# EAGLE board V1 (EAGLE 9.1.3)
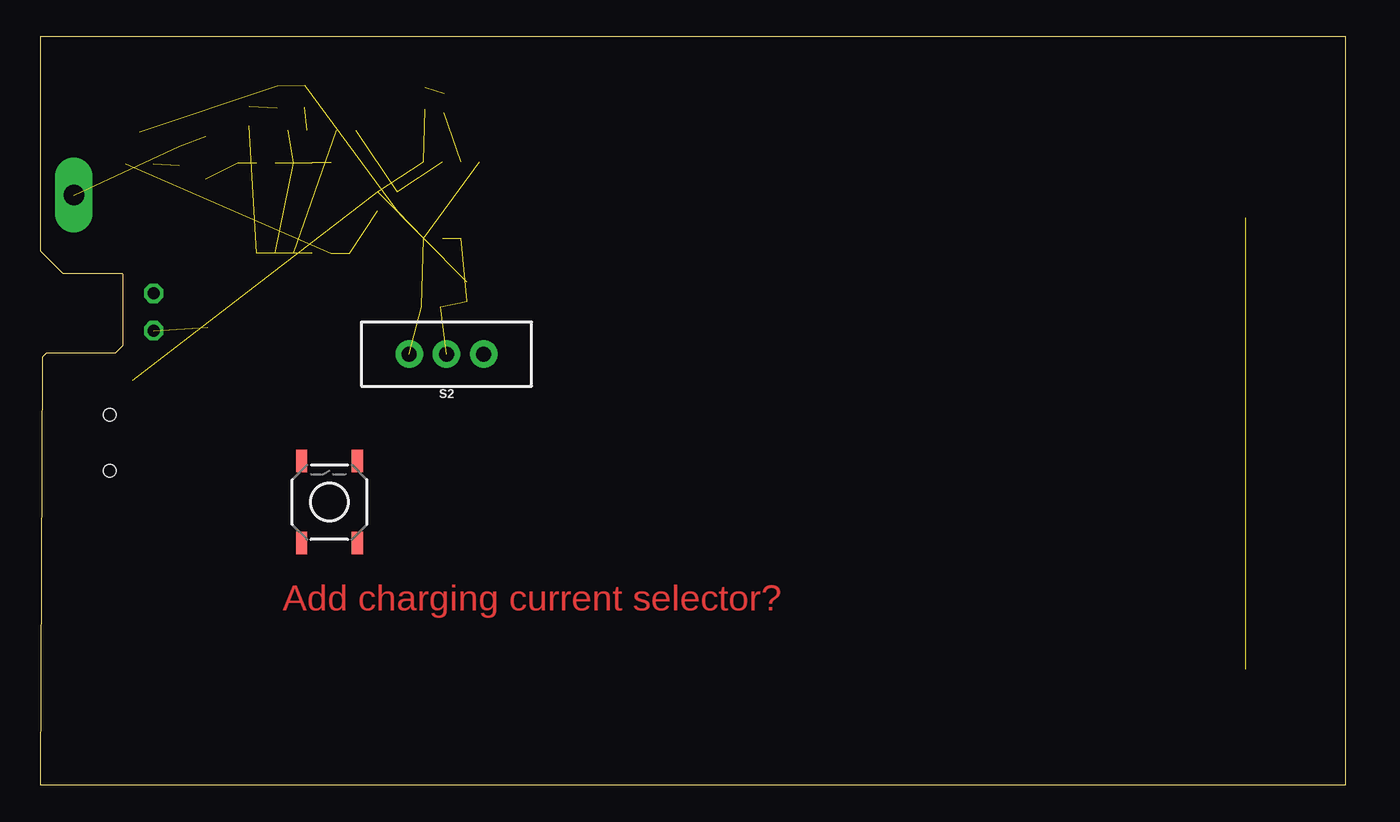
[diagram p0: board, top side]
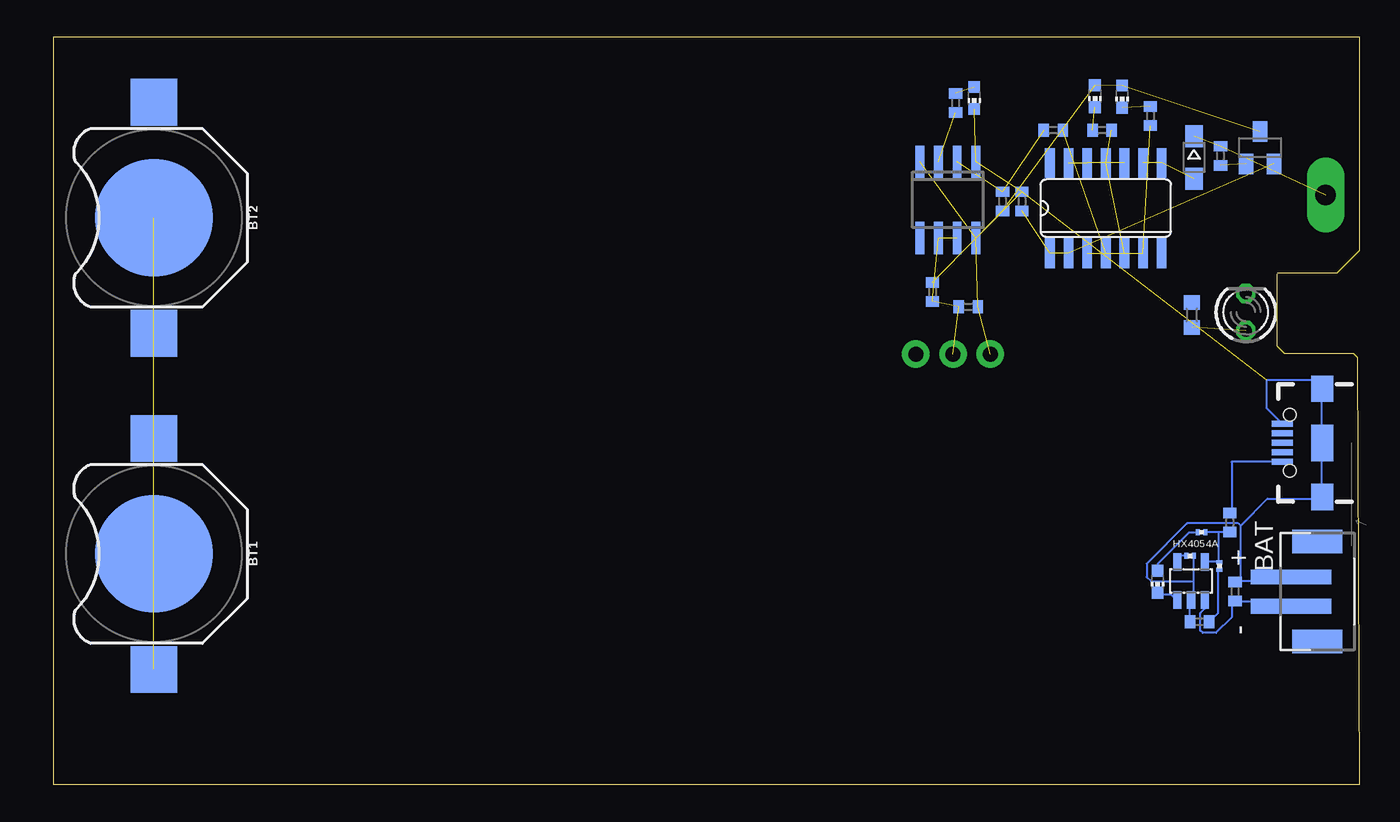
[diagram p1: board, bottom side, seen from below]

Size 89 x 51 mm. Coordinates in mm from the lower left corner, seen from the top.
Outline: 0,0 89,0 89,51 0,51 0,36.4 1.52,34.87 5.56,34.87 5.61,34.82 5.61,29.95 5.11,29.44 0.41,29.44 0.13,29.16 0,0
Copper layers (1*16): Top 0.035mm / dielectric 1.5mm / Bottom 0.035mm
Design rules "default": minimum track width 6mil, minimum drill 0.35mm, track to track 6mil, track to pad 6mil, pad to pad 6mil, via to via 6mil, smd to smd 6mil, copper to edge 40mil, drill to drill 6mil, minimum pad ring 10mil, minimum via ring 8mil, stop-mask expansion 4mil, vias tented up to drill 0mil, thermal gap 10mil

## Footprints (pad centres in the part's own frame; a part is rotated, then mirrored left to right if it is on the bottom)
JST-PH-2-SMT = smd 1 x 5.5: 1 -1,-1.8; 2 1,-1.8 | smd 1.6 x 3.4: NC1 -3.4,0; NC2 3.4,0
BATTCON_12MM = smd 8 x 8: GND 0,0 | smd 3.175 x 3.175: PWR@1 -7.874,0; PWR@2 7.874,0
C0402 = smd 0.7 x 0.9: 1 -0.65,0; 2 0.65,0
SOD323-W = smd 1.5 x 1.2: A 1.45,0; C -1.45,0
SO14 = smd 0.66 x 2.032: 1 -3.81,-3.073; 2 -2.54,-3.073; 3 -1.27,-3.073; 4 0,-3.073; 5 1.27,-3.073; 6 2.54,-3.073; 7 3.81,-3.073; 8 3.81,3.073; 9 2.54,3.073; 10 1.27,3.073; 11 0,3.073; 12 -1.27,3.073; 13 -2.54,3.073; 14 -3.81,3.073
SO08 = smd 0.6 x 2.2: 1 -1.905,-2.6; 2 -0.635,-2.6; 3 0.635,-2.6; 4 1.905,-2.6; 5 1.905,2.6; 6 0.635,2.6; 7 -0.635,2.6; 8 -1.905,2.6
USB-B-MICRO-SMD_RED_PASTE = smd 1.45 x 0.4: D+ 2.725,0; D- 2.725,0.65; GND 2.725,-1.3; ID 2.725,-0.65; VBUS 2.725,1.3 | smd 1.5 x 1.8: SHIELD1 0,3.685; SHIELD2 0,-3.685 | smd 1.5 x 2.5: SHIELD3 0,0 | hole 0.85: 2.2,1.9; 2.2,-1.9
LED3MM = drill 0.813 octagon: A -1.27,0; K 1.27,0
CHIP-LED0603 = smd 0.8 x 0.8: A 0,-0.75; C 0,0.75
1X1-BIGPOGO = drill 1.4 pad 2.54 long: P$1 0,0
R0201 = smd 0.28 x 0.43: 1 -0.255,0; 2 0.255,0
R0402 = smd 0.7 x 0.9: 1 -0.65,0; 2 0.65,0
R0603 = smd 1 x 1.1: 1 -0.85,0; 2 0.85,0
TACTILE_SWITCH_SMD_5.2MM = smd 1.524 x 0.762: 1 -2.794,1.905; 2 2.794,1.905; 3 -2.794,-1.905; 4 2.794,-1.905
SWITCH_SPDT_PTH_11.6X4.0MM = drill 1.016 pad 1.88: 1 0,2.54; 2 0,0; 3 0,-2.54
SOT23-BEC = smd 1 x 1.4: B -0.95,-1.1; C 0,1.1; E 0.95,-1.1
SOT23-5L = smd 0.55 x 1.2: 1 -0.95,-1.3; 2 0,-1.3; 3 0.95,-1.3; 4 0.95,1.3; 5 -0.95,1.3

## Placement (x,y rotation side)
BAT  [JST-PH-2-SMT]  2.84,13.18 270 bottom
BT1  [BATTCON_12MM]  82.17,15.75 90 bottom
BT2  [BATTCON_12MM]  82.17,38.66 90 bottom
C1  1uF  [C0402]  10.87,11.13 180 bottom
C2  4.7uF  [C0402]  8.46,13.18 90 bottom
C3  0.01uf  [C0402]  20.85,44.63 0 bottom
C4  0.01uf  [C0402]  29.08,33.6 90 bottom
D1  1N914  [SOD323-W]  11.25,42.77 270 bottom
IC2  4001D  [SO14]  17.27,39.32 0 bottom
IC3  NE555D  [SO08]  28.04,39.88 180 bottom
J1  [USB-B-MICRO-SMD_RED_PASTE]  2.51,23.32 180 bottom
LED1  [LED3MM]  7.72,32.23 90 bottom
LED2  [CHIP-LED0603]  13.74,13.84 180 bottom
LED3  RED  [CHIP-LED0603]  16.15,46.91 180 bottom
LED4  GREEN  [CHIP-LED0603]  18.01,46.94 180 bottom
LED5  YELLOW  [CHIP-LED0603]  26.24,46.81 180 bottom
PROBE  [1X1-BIGPOGO]  2.29,40.21 90 top
R1  1  [R0201]  9.53,14.94 90 bottom
R2  1k  [R0201]  10.74,17.22 0 bottom
R3  0.5  [R0402]  8.81,17.88 90 bottom
R4  2k  [R0201]  11.53,15.62 180 bottom
R5  2k  [R0603]  11.4,32.03 90 bottom
R6  1K  [R0402]  9.45,42.88 270 bottom
R7  390  [R0402]  22.99,39.78 270 bottom
R8  150  [R0402]  14.22,45.59 90 bottom
R9  150  [R0402]  17.53,44.63 180 bottom
R10  3.3k  [R0402]  24.31,39.78 270 bottom
R11  150  [R0402]  27.51,46.48 270 bottom
R12  20k  [R0402]  26.64,32.59 0 bottom
S1  MOMENTARY-SWITCH-SPST-SMD-5.2-REDUNDANT  [TACTILE_SWITCH_SMD_5.2MM]  19.71,19.28 90 top
S2  [SWITCH_SPDT_PTH_11.6X4.0MM]  27.69,29.36 90 top
T1  [SOT23-BEC]  6.76,43.43 0 bottom
U$1  [METRIC]  0,50 0 top
U$2  [IMPERIAL]  0,3.3 0 top
U$3  HX4054A  [SOT23-5L]  11.46,13.89 0 bottom

## Library data of the parts
BAT C1-C4 LED2-LED5 PROBE R3 R6-R12 = adafruit
BT1 BT2 = SparkFun-Batteries; PROD_ID: BATT-08044; SF_SKU: PRT-10592
D1 = diode
IC2 = 40xx
IC3 = linear
J1 = SparkFun-Connectors; PROD_ID: CONN-11752
LED1 = led
R1 R2 R4 R5 = rcl; SPICEPREFIX: R
S1 = SparkFun-Switches; PROD_ID: SWCH-08247; SF_SKU: COM-08720
S2 = SparkFun-Switches; PROD_ID: SWCH-08261; SF_SKU: COM-00102
T1 = transistor-neu-to92
U$1-U$3 = BuisinessCard

## Nets
+: BT1.PWR@1 BT2.PWR@1
-: BT1.GND BT2.GND
GND: BAT.1 C1.2 C2.2 C4.2 IC3.1 J1.GND J1.SHIELD1 J1.SHIELD2 J1.SHIELD3 LED5.C R4.1 R7.1 U$3.2
N$1: C1.1 R1.1
N$2: R1.2 R2.2 R3.1 U$3.4
N$3: LED2.A R2.1
N$4: LED2.C U$3.1
N$5: BAT.2 C2.1 U$3.3
N$6: R4.2 U$3.5
N$7: LED1.A R5.1
N$8: R6.2 T1.B
N$9: D1.C PROBE.P$1 R6.1
N$10: D1.A IC2.8 IC2.9
N$11: IC2.10 IC2.12 IC2.13
N$12: IC2.1 IC2.2 R7.2 T1.E
N$13: LED3.C R8.2
N$14: LED4.C R9.2
N$15: IC2.3 IC2.6 R8.1
N$16: IC2.5 IC2.11 R9.1
N$17: LED5.A R11.1
N$18: IC3.3 R11.2
N$19: C3.2 IC2.4
N$20: C3.1 IC3.2 R10.1
N$21: C4.1 IC3.6 IC3.7 R12.1 S2.2
N$22: IC3.4 IC3.8 LED3.A LED4.A R10.2 R12.2 S2.1 T1.C
VCC: J1.VBUS R3.2
VDD: IC2.14
VSS: IC2.7

## Tracks (layer width: path | path; a pad name or v marks a point on that pad's centre or on a via)
+  (1 unrouted)
-  (1 unrouted)
GND  (4 unrouted)
  Bottom 0.152: 2.59,23.32 2.59,19.66 J1.SHIELD1 2.59,19.51 6.25,19.51 8.08,17.68 | 2.59,23.32 2.59,26.98 J1.SHIELD2 2.59,27.13 3.05,27.58 6.3,27.58 6.3,25.68 J1.GND | 2.59,23.32 J1.SHIELD3 | 11.28,13.87 11.28,12.8 11.43,12.65 U$3.2 11.58,12.5 11.58,11.12 C1.2 | 11.28,13.87 R4.1 | 8.08,13.87 5.03,13.87 4.72,14.17 BAT.1 | 8.08,13.87 8.28,13.87 C2.2 | 11.28,13.87 14.17,13.87 14.48,14.17 14.48,15.09 11.73,17.83 8.23,17.83 8.08,17.68 | 8.08,13.87 8.08,17.68
N$1
  Bottom 0.152: R1.1 9.6,14.63 9.6,11.73 C1.1
N$2
  Bottom 0.152: 9.6,15.24 10.36,15.24 U$3.4 | 9.6,17.22 8.84,17.22 R3.1 | 9.6,17.22 R2.2 | 9.6,17.22 9.6,15.24 | 9.6,15.24 R1.2
N$3
  Bottom 0.152: R2.1 11.58,17.22 13.72,15.09 13.72,14.63 LED2.A
N$4
  Bottom 0.152: LED2.C 13.72,12.95 12.8,12.95 12.5,12.65 U$3.1
N$5
  Bottom 0.152: BAT.2 4.72,12.19 5.03,12.5 8.43,12.5 C2.1 8.69,12.39 8.69,11.43 9.75,10.36 10.67,10.36 10.82,10.52 10.82,11.73 10.52,12.04 10.52,12.5 U$3.3
N$6
  Bottom 0.152: R4.2 11.81,15.64 12.16,15.64 12.4,15.39 U$3.5
N$7  (1 unrouted)
N$8  (1 unrouted)
N$9  (2 unrouted)
N$10  (2 unrouted)
N$11  (2 unrouted)
N$12  (3 unrouted)
N$13  (1 unrouted)
N$14  (1 unrouted)
N$15  (2 unrouted)
N$16  (2 unrouted)
N$17  (1 unrouted)
N$18  (1 unrouted)
N$19  (1 unrouted)
N$20  (2 unrouted)
N$21  (4 unrouted)
N$22  (7 unrouted)
VCC
  Bottom 0.152: R3.2 8.69,18.59 8.69,22 8.67,22.02 J1.VBUS

## Text on the board
Top: Add charging current selector?
Pads: Designed & Hand Assembled with | <3 | by | AndreiAldea | .com | Electrical Engineering Technology